# EAGLE board TeensyPinout (EAGLE 8.4.3)
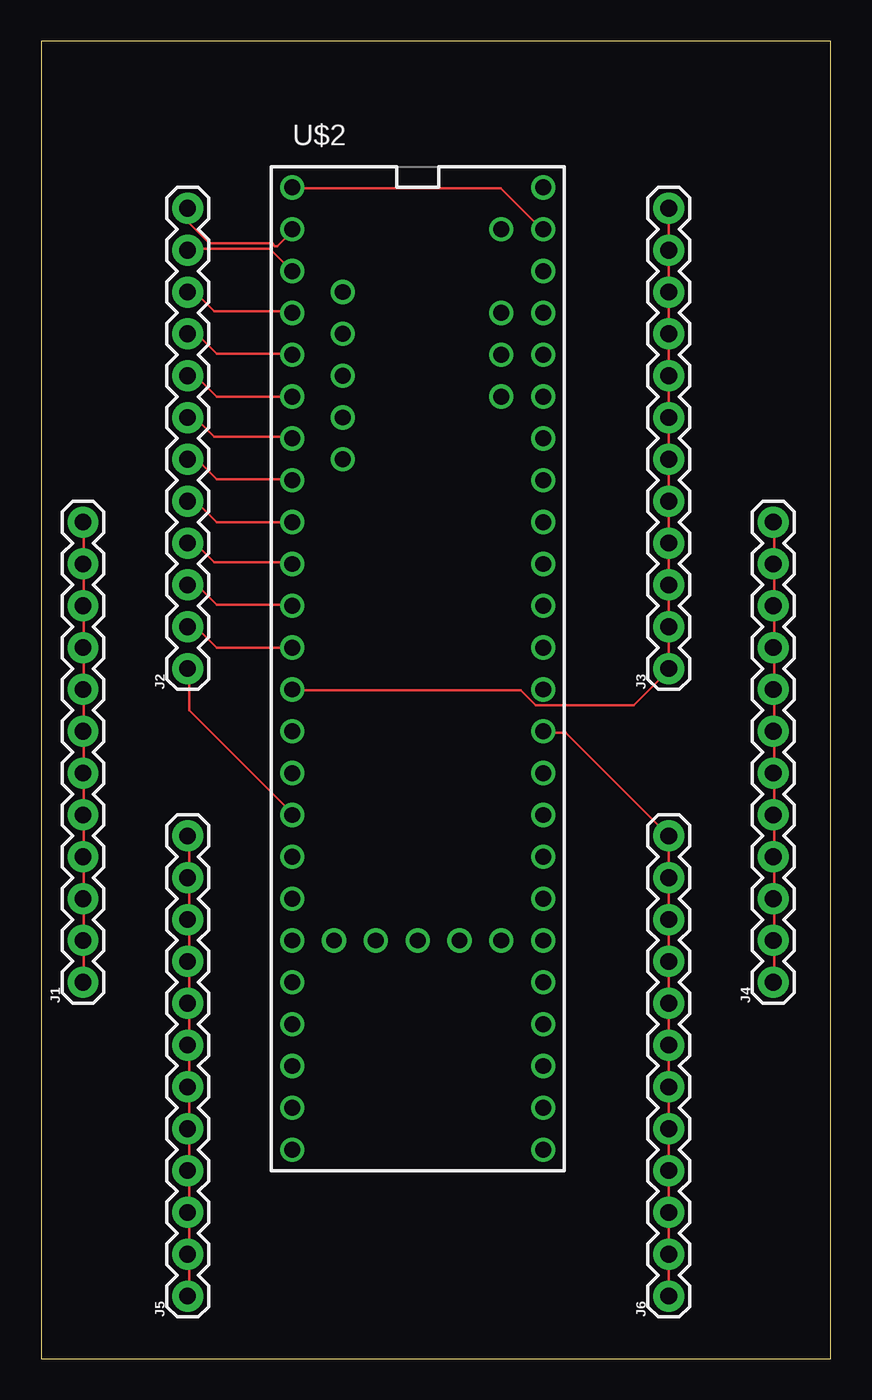
[diagram p0: board, top side]
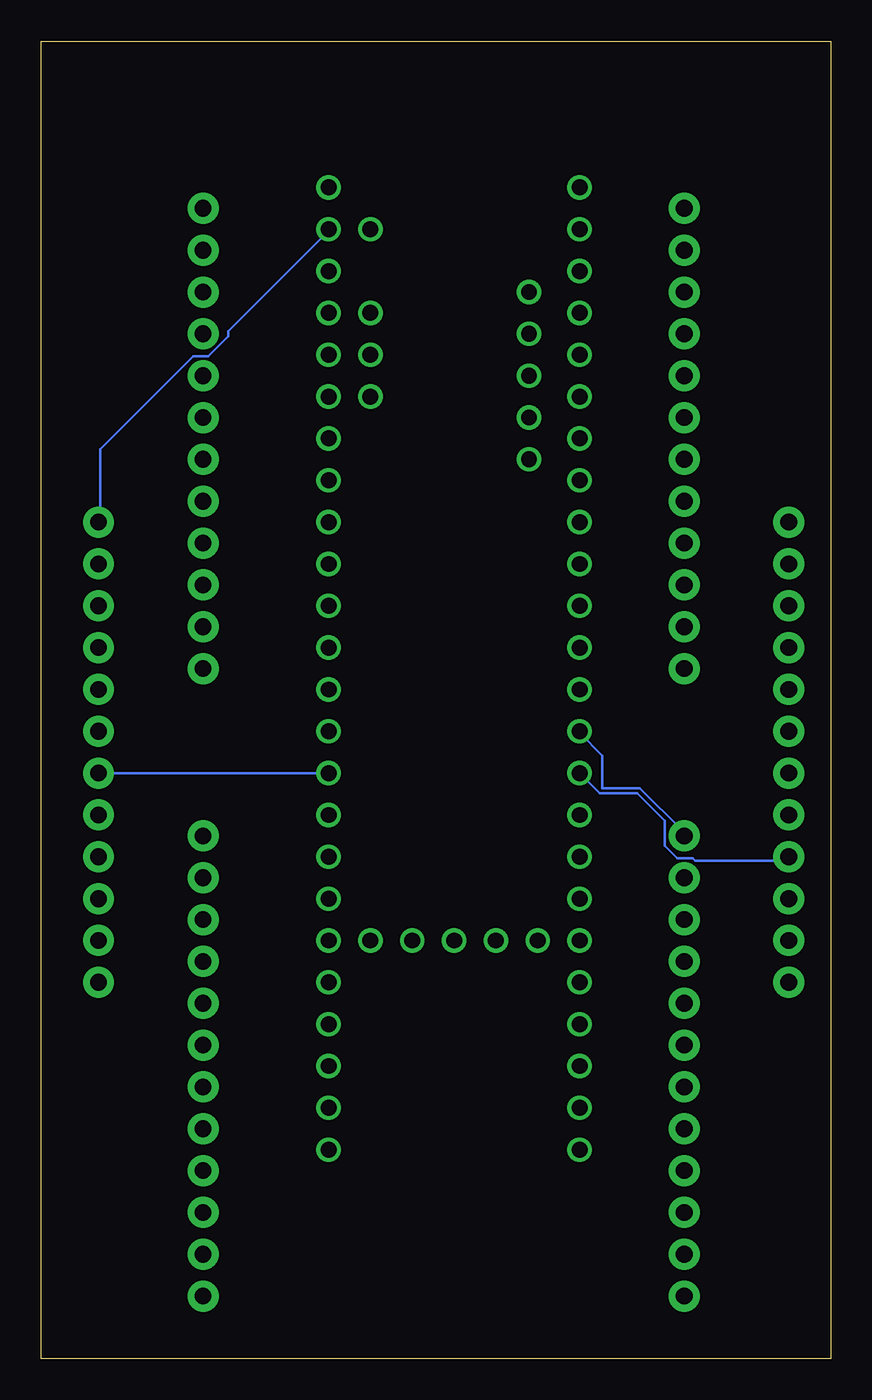
[diagram p1: board, bottom side, seen from below]

Size 47.93 x 80 mm. Coordinates in mm from the lower left corner, seen from the top.
Outline: 0,0 47.93,0 47.93,80 0,80 0,0
Copper layers (1*16): Top 0.035mm / dielectric 1.5mm / Bottom 0.035mm
Design rules "default": minimum track width 6mil, minimum drill 0.35mm, track to track 6mil, track to pad 6mil, pad to pad 6mil, via to via 6mil, smd to smd 6mil, copper to edge 40mil, drill to drill 6mil, minimum pad ring 10mil, minimum via ring 8mil, stop-mask expansion 4mil, vias tented up to drill 0mil, thermal gap 10mil

## Footprints (pad centres in the part's own frame; a part is rotated, then mirrored left to right if it is on the bottom)
1X12 = drill 1.016 pad 1.88: 1 0,0; 2 2.54,0; 3 5.08,0; 4 7.62,0; 5 10.16,0; 6 12.7,0; 7 15.24,0; 8 17.78,0; 9 20.32,0; 10 22.86,0; 11 25.4,0; 12 27.94,0
TEENSY-3.6_ONLY_HOLES = drill 0.965: 0 -7.62,5.08; 1 -7.62,2.54; 2 -7.62,0; 3 -7.62,-2.54; 3.3V_2 -2.54,-38.1; 3V3_1 -7.62,-27.94; 3V3_MAX_250 7.62,2.54; 4 -7.62,-5.08; 5 -7.62,-7.62; 6 -7.62,-10.16; 7 -7.62,-12.7; 8 -7.62,-15.24; 9 -7.62,-17.78; 10 -7.62,-20.32; 11 -7.62,-22.86; 12 -7.62,-25.4; 13 7.62,-25.4; 14 7.62,-22.86; 15 7.62,-20.32; 16 7.62,-17.78; 17 7.62,-15.24; 18 7.62,-12.7; 19 7.62,-10.16; 20 7.62,-7.62; 21 7.62,-5.08; 22 7.62,-2.54; 23 7.62,0; 24 -7.62,-30.48; 25 -7.62,-33.02; 26 -7.62,-35.56; 27 -7.62,-38.1; 28 -7.62,-40.64; 29 -7.62,-43.18; 30 -7.62,-45.72; 31 -7.62,-48.26; 32 -7.62,-50.8; 33 7.62,-50.8; 34 7.62,-48.26; 35 7.62,-45.72; 36 7.62,-43.18; 37 7.62,-40.64; 38 7.62,-38.1; 39 7.62,-35.56; +5V -4.547,1.27; A10 5.08,-2.54; A11 5.08,-5.08; A21 7.62,-33.02; A22 7.62,-30.48; AGND 7.62,5.08; AREF 5.08,0; D+ -4.547,-3.81; D- -4.547,-1.27; GND1 -7.62,7.62; GND2 7.62,-27.94; GND3 -4.547,-6.35; GND4 -4.547,-8.89; GND5 0,-38.1; PROGRAM 2.54,-38.1; RESET 5.08,-38.1; VBAT -5.08,-38.1; VIN 7.62,7.62; VUSB 5.08,5.08

## Placement (x,y rotation side)
J1  [1X12]  2.54,22.86 90 top
J2  [1X12]  8.89,41.91 90 top
J3  [1X12]  38.1,41.91 90 top
J4  [1X12]  44.45,22.86 90 top
J5  [1X12]  8.89,3.81 90 top
J6  [1X12]  38.1,3.81 90 top
U$2  [TEENSY-3.6_ONLY_HOLES]  22.86,63.5 0 top

## Library data of the parts
J1-J6 = SparkFun-Connectors
U$2 = Teensy-3.6

## Nets
GND: J4.1 J4.2 J4.3 J4.4 J4.5 J4.6 J4.7 J4.8 J4.9 J4.10 J4.11 J4.12 U$2.AGND U$2.GND1 U$2.GND2
MISO: J5.1 J5.2 J5.3 J5.4 J5.5 J5.6 J5.7 J5.8 J5.9 J5.10 J5.11 J5.12 U$2.12
MOSI: J3.1 J3.2 J3.3 J3.4 J3.5 J3.6 J3.7 J3.8 J3.9 J3.10 J3.11 J3.12 U$2.11
N$2: J2.12 U$2.0
N$3: J2.10 U$2.2
N$5: U$2.27
N$6: J2.9 U$2.3
N$7: J2.11 U$2.1
N$8: J2.8 U$2.4
N$9: J2.7 U$2.5
N$10: J2.6 U$2.6
N$11: J2.5 U$2.7
N$12: J2.4 U$2.8
N$13: J2.3 U$2.9
N$14: J2.2 U$2.10
N$15: J2.1 U$2.24
SCK: J6.1 J6.2 J6.3 J6.4 J6.5 J6.6 J6.7 J6.8 J6.9 J6.10 J6.11 J6.12 U$2.13
VCC: J1.1 J1.2 J1.3 J1.4 J1.5 J1.6 J1.7 J1.8 J1.9 J1.10 J1.11 J1.12 U$2.3V3_1
VIN(3.6-6V): U$2.VIN

## Tracks (layer width: path | path; a pad name or v marks a point on that pad's centre or on a via)
GND
  Top 0.152: U$2.GND1 15.24,71.07 27.89,71.07 30.48,68.48 U$2.AGND | J4.1 44.5,22.91 44.5,25.35 J4.2 44.5,25.5 44.5,27.94 | 44.5,27.94 44.5,30.38 J4.4 44.5,30.53 44.5,32.97 J4.5 44.5,33.12 44.5,35.56 | 44.5,27.94 J4.3 | 44.5,43.18 44.5,45.62 J4.10 44.5,45.77 44.5,48.21 J4.11 44.5,48.36 44.5,50.8 J4.12 | 44.5,35.56 44.5,38 J4.7 44.5,38.15 44.5,40.59 J4.8 44.5,40.74 44.5,43.18 | 44.5,43.18 J4.9 | 44.5,35.56 J4.6
  Bottom 0.152: J4.6 U$2.GND2 | U$2.AGND 30.48,68.48 36.58,62.38 36.58,62.08 37.8,60.86 38.71,60.86 44.35,55.22 44.35,50.8 J4.12
MISO
  Top 0.152: J5.1 8.99,3.86 8.99,6.3 J5.2 8.99,6.45 8.99,8.89 | 8.99,8.89 8.99,11.33 J5.4 8.99,11.48 8.99,13.92 J5.5 8.99,14.07 8.99,16.51 | 8.99,8.89 J5.3 | 8.99,16.51 8.99,18.95 J5.7 8.99,19.1 8.99,21.54 J5.8 8.99,21.69 8.99,24.13 | 8.99,24.13 8.99,26.57 J5.10 8.99,26.72 8.99,29.16 J5.11 8.99,29.31 8.99,31.75 J5.12 | 8.99,24.13 J5.9 | 8.99,16.51 J5.6
  Bottom 0.152: U$2.12 15.24,38 13.87,36.63 13.87,34.65 11.58,34.65 8.99,32.05 8.99,31.75 J5.12
MOSI
  Top 0.152: J3.12 J3.11 J3.10 J3.9 J3.8 J3.7 J3.6 J3.5 J3.4 J3.3 J3.2 J3.1 38.1,41.81 35.97,39.68 30.02,39.68 29.11,40.59 15.24,40.59 U$2.11
N$2
  Top 0.152: U$2.0 15.24,68.48 14.33,67.56 14.17,67.56 14.02,67.72 10.21,67.72 8.99,68.94 8.99,69.85 J2.12
N$3
  Top 0.152: U$2.2 15.24,63.6 10.52,63.6 9.45,64.67 8.99,64.67 J2.10
N$6
  Top 0.152: J2.9 9.45,62.23 10.67,61.01 15.24,61.01 U$2.3
N$7
  Top 0.152: U$2.1 13.87,67.41 8.99,67.41 J2.11
N$8
  Top 0.152: U$2.4 10.67,58.42 9.45,59.64 8.99,59.64 J2.8
N$9
  Top 0.152: U$2.5 15.24,55.98 10.52,55.98 9.45,57.05 8.99,57.05 J2.7
N$10
  Top 0.152: J2.6 9.45,54.61 10.67,53.39 15.24,53.39 U$2.6
N$11
  Top 0.152: U$2.7 10.67,50.8 9.45,52.02 8.99,52.02 J2.5
N$12
  Top 0.152: U$2.8 15.24,48.36 10.52,48.36 9.45,49.43 8.99,49.43 J2.4
N$13
  Top 0.152: J2.3 9.45,46.99 10.67,45.77 15.24,45.77 U$2.9
N$14
  Top 0.152: U$2.10 10.67,43.18 9.45,44.4 8.99,44.4 J2.2
N$15
  Top 0.152: U$2.24 15.24,33.12 8.99,39.37 8.99,41.81 J2.1
SCK
  Top 0.152: U$2.13 30.48,38 31.85,38 J6.12 J6.11 J6.10 J6.9 J6.8 J6.7 J6.6 J6.5 J6.4 J6.3 J6.2 J6.1
VCC
  Top 0.152: 2.59,35.56 2.59,38 J1.7 2.59,38.15 2.59,40.59 J1.8 2.59,40.74 2.59,43.18 | 2.59,43.18 2.59,45.62 J1.10 2.59,45.77 2.59,48.21 J1.11 2.59,48.36 2.59,50.8 J1.12 | 2.59,43.18 J1.9 | J1.1 2.59,22.91 2.59,25.35 J1.2 2.59,25.5 2.59,27.94 | 2.59,27.94 2.59,30.38 J1.4 2.59,30.53 2.59,32.97 J1.5 2.59,33.12 2.59,35.56 | 2.59,27.94 J1.3 | 2.59,35.56 J1.6
  Bottom 0.152: U$2.3V3_1 14.02,34.34 11.73,34.34 10.06,32.66 10.06,31.14 9.3,30.38 8.38,30.38 8.23,30.23 2.74,30.23 2.59,30.38 J1.4